# Altium PCB REB215_XPRO_A.PcbDoc (part 1 of 2)
Units mm, origin at the board's own origin, x right, y up, seen from the top; angles counter-clockwise.
Board outline 71.5 x 30 mm, 4 copper layers (Top Layer LF-signals, Mid-1, Mid-2, Bottom Layer LF-signals), stack 0.778 mm thick; 79 components, 55 nets, 329 pads, 316 vias.
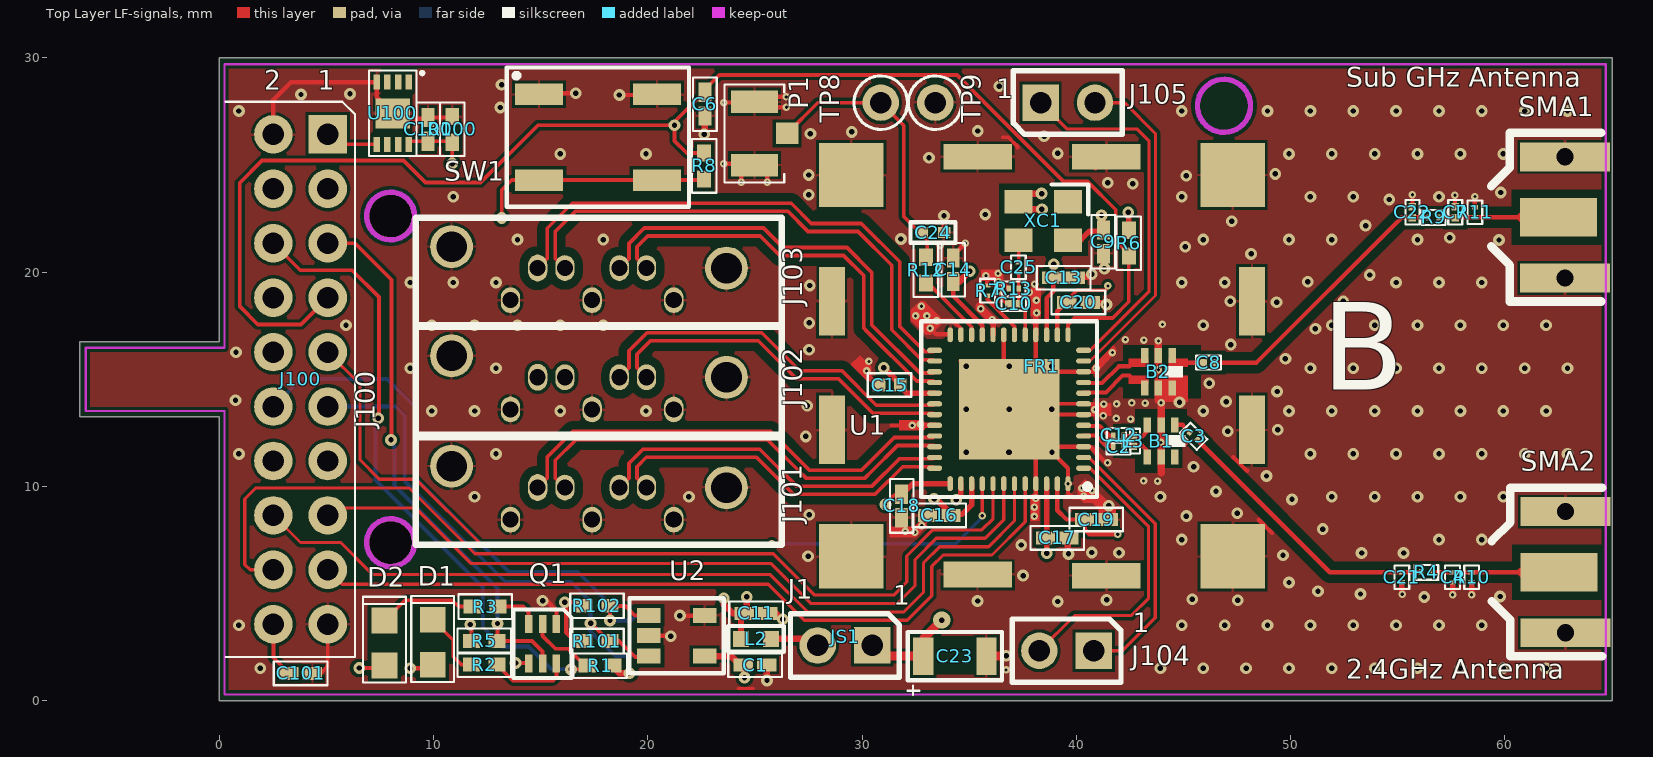
[diagram p0: Top Layer LF-signals view]
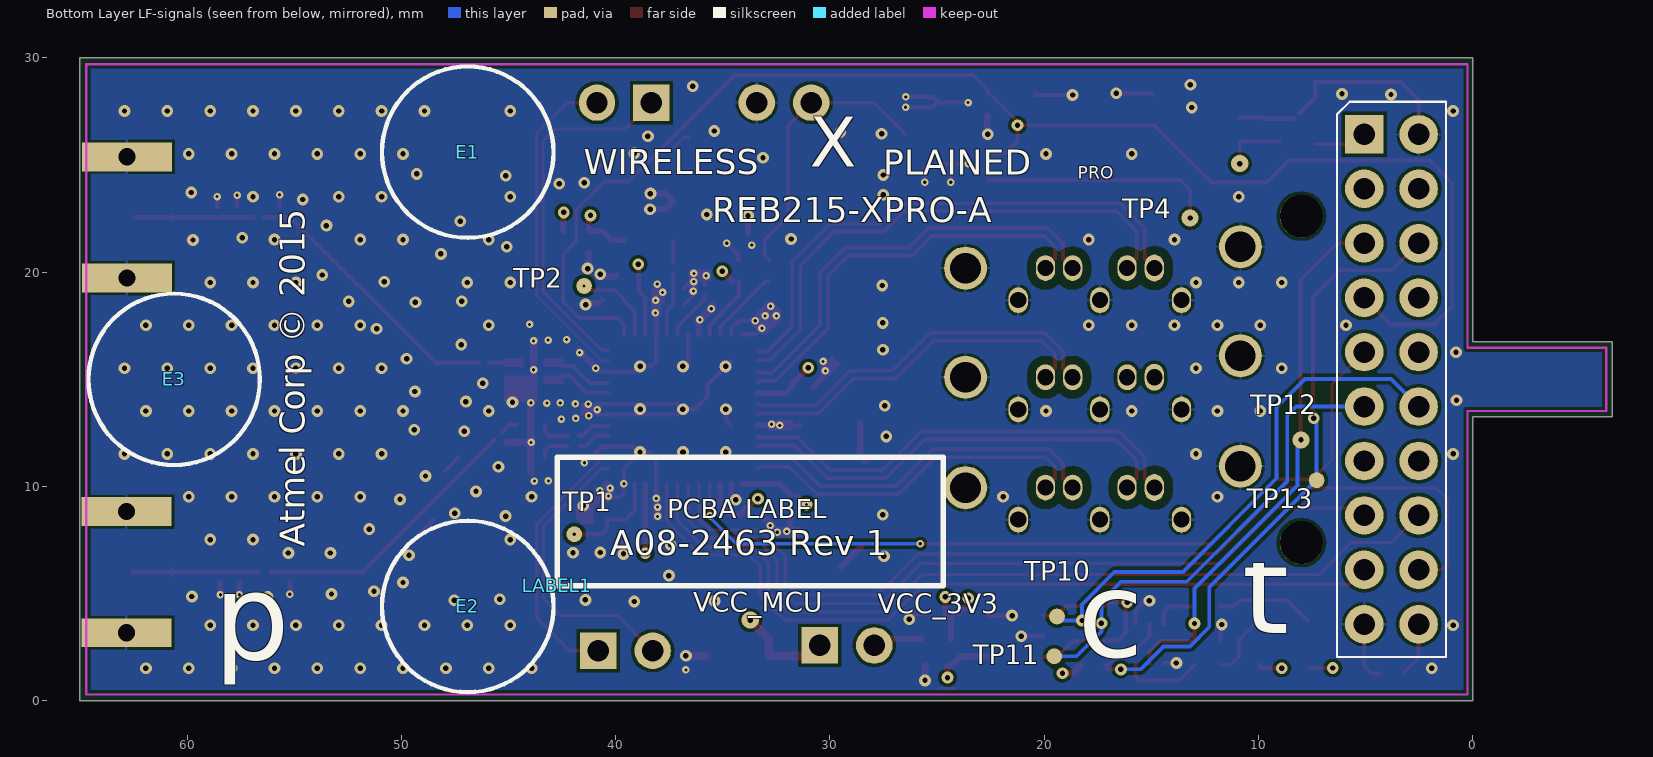
[diagram p1: Bottom Layer LF-signals view, seen from below]
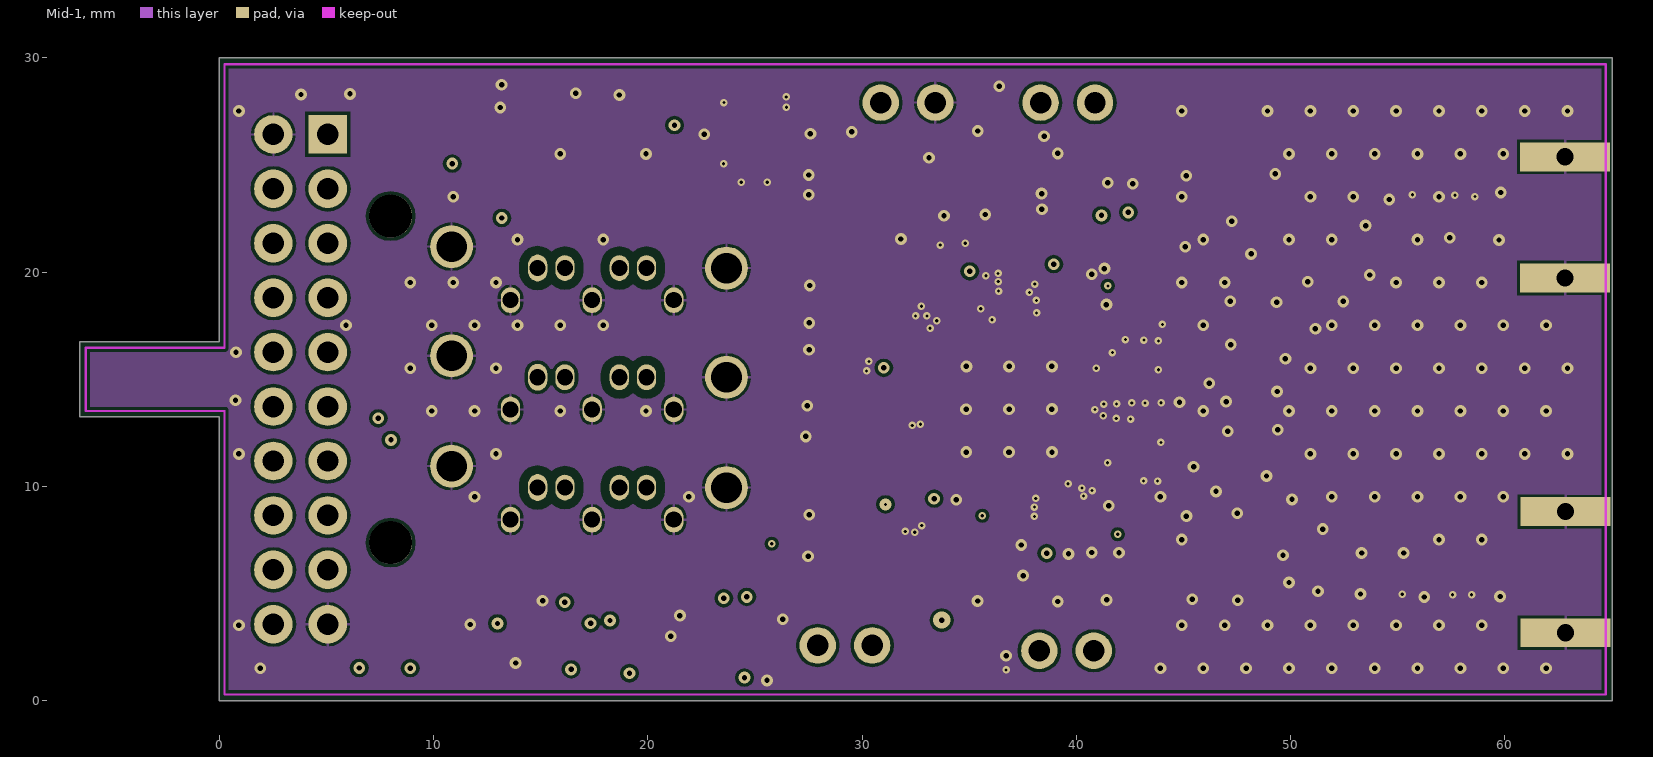
[diagram p2: Mid-1]
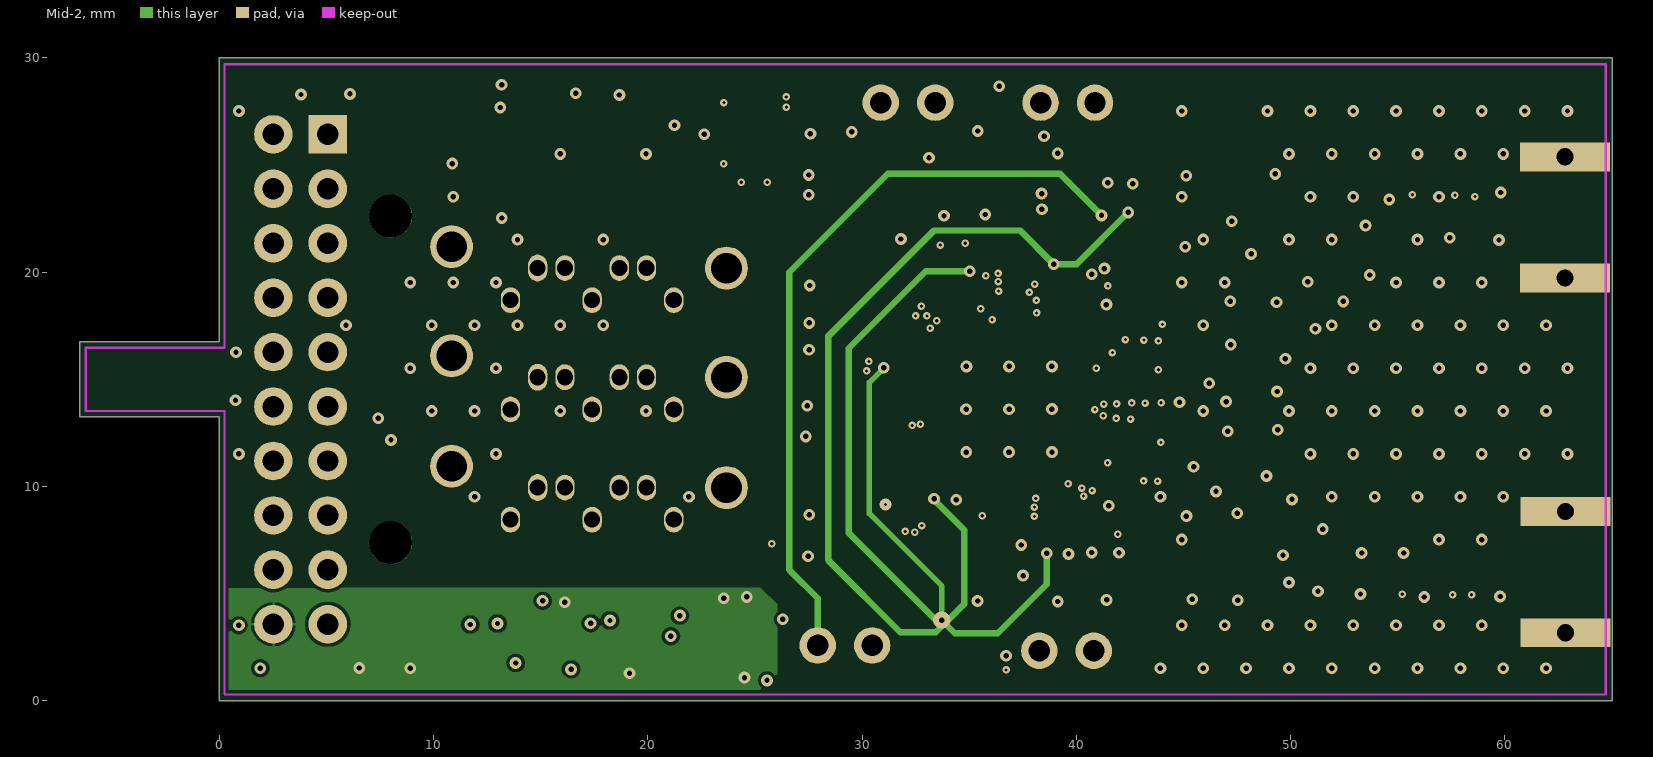
[diagram p3: Mid-2]

## Layer stack, top to bottom
Top Solder: solder mask 0.0102, Solder Resist, Dk 3.5
Top Layer LF-signals: signal copper 0.0356
Dielectric1: core 0.254, FR-4, Dk 4.2
Mid-1: signal copper 0.036
Dielectric2: prepreg 0.127, FR-4, Dk 4.2
Mid-2: signal copper 0.036
Dielectric3: core 0.254, FR-4, Dk 4.2
Bottom Layer LF-signals: signal copper 0.0356
Bottom Solder: solder mask 0.0102, Solder Resist, Dk 3.5

## Board outline
-6.5,13.25 -6.5,16.75 0,16.75 0,30 65,30 65,0 0,0 0,13.25

## Design rules (kind name [scope] priority, off if disabled: settings)
AcuteAngle [All] p1: minimum=5.00000000000000E+0001 checktracksonly=TRUE
AssemblyTestPointUsage [All] p1: allowmultiple=TRUE
AssemblyTestpoint [All] p1: testpointundercomponent=TRUE minsize=0.55 maxsize=10 preferedsize=0.8 minholesize=0 maxholesize=2 preferedholesize=0.25 testpointgrid=0.025 usegrid=FALSE gridtolerance=0 allowsidebottom=TRUE minspacing=1.27 compbodyclearance=0.127
Clearance Clearance_TP [InComponentClass('TP') vs IsRegion] p1 off: gap=0.3
Clearance Clearance_Mid_Layer [OnLayer('Mid-2')] p2 off: gap=0.3
Clearance Clearance_Poly_Impedance [IsRegion vs (InDifferentialPairClass('All Differential Pairs') OR InNet('NetC22_1') OR InNet('NetC7_1') OR InNet('NetC3_2') OR InNet('NetB1_1') OR InNet('NetC4_1')) OR Innet('netRF24_P') OR InNet('NetC8_2') OR InNet('NetC8_1') OR InNet('NetB1_3') OR InNet('NetB1_4')] p3: gap=0.4
Clearance 900Mhz_df [InNet('RF09_P') or InNet('RF09_N') Or InNet('RF24_P') or InNet('RF24_N')] p4: gap=0.16
Clearance Clearance_SPI [InNetClass('SPI') vs InNetClass('SPI')] p5: gap=0.24
Clearance "Stitching GND" [IsStitchingVia and InNet('GND') vs (IsVia and (Not IsStitchingVia)) Or IsPad] p6: gap=0.2
Clearance Clearance_Poly_Impedance_1 [IsRegion vs (InNet('VCC_TARGET') OR InNet('VCC_3V3') OR InNet('NetJ1_1'))] p7 off: gap=0.3
Clearance Clearance_Poly [IsRegion vs (OnLayer('Top Layer LF-signals') OR OnLayer('Bottom Layer LF-signals'))] p8: gap=0.16
Clearance [All] p9: gap=0.15
DiffPairsRouting DiffPairsRouting_900 [InNet('RXD09_N') and Innet('RXD09_P')] p1: maxlimit=0.254 minlimit=0.25 mostfreqgap=0.254 toplayer_maxgap=0.25 toplayer_prefgap=0.25 toplayer_minwidth=0.19 toplayer_maxwidth=0.19 toplayer_prefwidth=0.19 midlayer1_mingap=0.254 midlayer1_minwidth=0.381 midlayer1_maxwidth=0.381 midlayer1_prefwidth=0.381 midlayer2_mingap=0.254 midlayer2_minwidth=0.381 midlayer2_maxwidth=0.381 midlayer2_prefwidth=0.381 bottomlayer_maxgap=0.25 bottomlayer_prefgap=0.25 bottomlayer_minwidth=0.19 bottomlayer_maxwidth=0.19 bottomlayer_prefwidth=0.19 maxuncoupledlength=20
DiffPairsRouting [InNet('RXD24_N') and Innet('RXD24_P')] p2: maxlimit=0.3 minlimit=0.203 mostfreqgap=0.25 toplayer_mingap=0.25 toplayer_maxgap=0.25 toplayer_minwidth=0.195 toplayer_maxwidth=0.195 toplayer_prefwidth=0.195 midlayer1_minwidth=0.381 midlayer1_maxwidth=0.381 midlayer1_prefwidth=0.381 midlayer2_minwidth=0.381 midlayer2_maxwidth=0.381 midlayer2_prefwidth=0.381 bottomlayer_mingap=0.25 bottomlayer_maxgap=0.25 bottomlayer_minwidth=0.195 bottomlayer_maxwidth=0.195 bottomlayer_prefwidth=0.195 maxuncoupledlength=20
FabricationTestPointUsage TestPointUsage [All] p1: valid=0 allowmultiple=TRUE
FabricationTestpoint Testpoint [All] p1: side=2 testpointundercomponent=TRUE minsize=0.55 maxsize=10 preferedsize=0.8 minholesize=0 maxholesize=2 preferedholesize=0.25 testpointgrid=0 allowsidebottom=TRUE usegrid=FALSE gridtolerance=0 minspacing=1.27 compbodyclearance=0.127
HoleSize [All] p1: absolutevalues=TRUE maxlimit=10 minlimit=0.15 maxpercent=80.000 minpercent=20.000
HoleToHoleClearance [All] p1 off: gap=0.3 allowstackedmicrovias=TRUE
MaxMinImpedance "50ohm Impedance" [InNetClass('50ohm Impedance')] p1: minimum=49.00 maximum=51.00
MinimumAnnularRing MinimumAnnularRing_SATA [InComponentClass('Sata')] p1: minimumring=0.04
MinimumAnnularRing [All] p2: minimumring=0.1
MinimumSolderMaskSliver [All] p1: minsoldermaskwidth=0.075
PlaneClearance [All] p1: clearance=0.2
PlaneConnect PlaneConnect_VIA [IsVia] p1: planeconnectstyle=Direct reliefexpansion=0.508 reliefentries=4 reliefconductorwidth=0.254 reliefairgap=0.254
PlaneConnect [All] p2: planeconnectstyle=Relief reliefexpansion=0.508 reliefentries=4 reliefconductorwidth=0.254 reliefairgap=0.254
PolygonConnect PolygonConnect_VIA [IsVia OR HasPad('Free-666')] p1: connectstyle=Direct reliefconductorwidth=0.254 reliefentries=4 polygonreliefangle="90 Angle" airgapwidth=0.254
PolygonConnect [All] p2: connectstyle=Relief reliefconductorwidth=0.125 reliefentries=4 polygonreliefangle="90 Angle" airgapwidth=0.125
RoutingVias [All] p1: holewidth=0.15 width=0.35 viastyle="Through Hole" minholewidth=0.15 minwidth=0.35 maxholewidth=0.5 maxwidth=1
SMDNeckDown [All] p1 off: percent=90.000
SilkToSilkClearance SilkToSilkClearance_Text [IsText vs IsText] p1: silktosilkclearance=0
SilkToSilkClearance [All] p2: silktosilkclearance=0.1
SilkToSolderMaskClearance SilkscreenOverComponentPads [IsPad] p1 off: minsilkscreentomaskgap=0.01 clearancetoexposedcopper=TRUE
SolderMaskExpansion SolderMaskTenting [IsVia AND NOT (IsFabTestpoint OR IsAssyTestpoint)] p1: expansion=-1
SolderMaskExpansion [All] p2: expansion=0.05
ViasUnderSMD [All] p1: allowed=FALSE
Width [All] p1: maxlimit=10 minlimit=0.1 preferedwidth=0.15 toplayer_maxwidth=2 toplayer_prefwidth=0.125 bottomlayer_maxwidth=2 bottomlayer_prefwidth=0.125 minimp=40.000000 maximp=50.000000 favimp=45.000000
17 further rules are at their usual default settings.

## Classes and differential pairs
component class REB215_XPRO_A_TopLevel: E1 E2 E3 LABEL1 PCB1 PCBADOC1 "TEST PROCEDURE" "TEST SW"
component class REB215_XPRO_A: B1 B2 C1 C2 C3 C4 C6 C7 C8 C9 C10 C11 C12 C13 C14 C15 C16 C17 C18 C19 C20 C21 C22 C23 C24 C25 D1 D2 FR1 J1 JS1 L2 L3 P1 Q1 R1 R2 R3 R4 R5 R6 R7 R8 R9 R10 R11 R12 R13 R101 R102 SMA1 SMA2 SW1 TP1 TP2 TP4 TP8 TP9 TP10 TP11 TP12 TP13 U1 U2 XC1
component class Sata: J101 J102 J103 J104 J105
differential pair RXCLK: +RXCLK_P -RXCLK_N
differential pair RXD09: +RXD09_P -RXD09_N
differential pair RXD24: +RXD24_P -RXD24_N
differential pair TXCLK: +TXCLK_P -TXCLK_N
differential pair TXD: +TXD_P -TXD_N
differential pair B1: +B1_P -B1_N

## Components (designator, comment, footprint, x,y, rotation, side; value= is the part's Value field where it differs from the comment)
B1 "Balun_2.4GHz" AP3-00060 44.602,12.869 r270 top
B2 "Balun_2.4GHz" AP3-00060 44.482,16.103 r270 top
C1 "CAP-NONPOL" AP1-00001#1 25.008,1.664 r180 top
C2 "CAP-NONPOL" AP1-00035 41.966,11.854 r0 top
C3 "CAP-NONPOL" AP1-00035 45.476,12.35 r315 top
C4 "This 1.2pF capacitor is used for RF antennae tuning and can not be replaced by alternatives." AP1-00035 57.557,5.765 r270 top
C6 "CAP-NONPOL" AP1-00001#1 22.667,27.84 r270 top
C7 "C0G, NP0" AP1-00032 57.679,22.796 r90 top
C8 "CAP-NONPOL" AP1-00032 46.167,15.777 r0 top
C9 "CAP-NONPOL" AP1-00001#1 41.263,21.414 r270 top
C10 "High Temp version" AP1-00032 37.085,18.528 r180 top
C11 "CAP-NONPOL" AP1-00001#1 25.053,4.079 r180 top
C12 "CAP-NONPOL" AP1-00035 41.967,12.388 r0 top
C13 "CAP-NONPOL" AP1-00001#1 39.403,19.739 r0 top
C14 "CAP-NONPOL" AP1-00001#1 34.252,20.111 r90 top
C15 "CAP-NONPOL" AP1-00001#2 31.282,14.735 r180 top
C16 "CAP-NONPOL" AP1-00001#1 33.604,8.649 r180 top
C17 "CAP-NONPOL" AP1-00001#1 39.107,7.598 r0 top
C18 "CAP-NONPOL" AP1-00001#1 31.846,9.092 r270 top
C19 "CAP-NONPOL" AP1-00001#1 40.934,8.458 r0 top
C20 "CAP-NONPOL" AP1-00001#1 40.096,18.588 r0 top
C21 "This 1.2pF capacitor is used for RF antennae tuning and can not be replaced by alternatives." AP1-00035 55.191,5.766 r270 top
C22 "C0G, NP0" AP1-00032 55.684,22.796 r90 top
C23 "CAP-NONPOL" AP1-00026 34.329,2.088 r0 top
C24 "CAP-NONPOL" AP1-00038 33.312,21.848 r0 top
C25 "Alternate PN GRM033R71C102KA01D  is good, but for Rated Voltage" AP1-00035 37.3,20.225 r270 top
C100 "Recommended by Escatec. No datasheet available yet." AP1-00001#1 9.75,26.665 r90 top
C101 "Recommended by Escatec. No datasheet available yet." AP1-00001#1 3.8,1.275 r0 top
D1 "LED_12" AP4-00013 9.962,2.732 r270 top
D2 "LED_12" AP4-00013 7.72,2.696 r270 top
E1 "RUBBER FEET" AP8-00192 46.9,25.6 r180 bottom locked
E2 "RUBBER FEET" AP8-00192 46.9,4.4 r180 bottom locked
E3 "RUBBER FEET" AP8-00192 60.6,15 r180 bottom locked
FR1 "Shield 20mm x 20mm Frame" AP8-00753 48.093,5.939 r90 top locked
J1 "HEADER 1x2" AP8-00733 29.201,2.582 r180 top
J100 "HEADER-2X10" AP8-00621 3.8,15 r90 top locked
J101 "SATA_7PIN_HEADER" AP8-00746 17.258,9.7 r0 top locked
J102 "SATA_7PIN_HEADER" AP8-00746 17.258,14.846 r0 top locked
J103 "SATA_7PIN_HEADER" AP8-00746 17.258,19.942 r0 top locked
J104 "HEADER 1x2" AP8-00733 39.542,2.335 r180 top locked
J105 "HEADER 1x2" AP8-00733 39.599,27.91 r0 top locked
JS1 "To be used by request from ESCATEC" AP8-00525 29.214,2.996 r0 top
L2 "Inductor_Iron" AP3-00049 25.749,2.885 r180 top
L3 "ceramic chip inductor, 5.6nH, 0201" AP3-00041 42.649,12.121 r270 top
LABEL1 "Comment" AP8-00317 42.715,5.365 r180 bottom
P1 "Copy of A08-0629" AP8-00380 24.973,26.473 r90 top
Q1 "Same as 2N7002 but with two MOSFETs in one package" AP5-00001 15.089,2.662 r270 top
R1 "R2" AP2-00000 17.773,1.637 r0 top
R2 "R2" AP2-00000 12.367,1.686 r180 top
R3 "R2" AP2-00000 12.41,4.395 r180 top
R4 "Copy of A02-0534" AP2-00028 56.337,5.999 r0 top
R5 "R2" AP2-00000 12.372,2.793 r180 top
R6 "R2" AP2-00000 42.446,21.353 r90 top
R7 "R2" AP2-00028 35.854,19.139 r90 top
R8 "R2" AP2-00000 22.633,24.956 r90 top
R9 "Copy of A02-0534" AP2-00028 56.669,22.558 r0 top
R10 "Copy of A02-0535" AP2-00028 58.441,5.765 r90 top
R11 "Copy of A02-0535" AP2-00028 58.596,22.795 r270 top
R12 "R2" AP2-00000 32.98,20.097 r270 top
R13 "Copy of A02-0535" AP2-00028 37.077,19.232 r0 top
R100 "R2" AP2-00000 10.875,26.665 r270 top
R101 "R2" AP2-00000 17.63,2.789 r180 top
R102 "R2" AP2-00000 17.63,4.434 r180 top
SMA1 "Board Edge Mounting" AP8-00443 62.502,22.558 r180 top locked
SMA2 "Board Edge Mounting" AP8-00443 62.526,6 r180 top locked
SW1 "same as A08-0091 but less force is needed; Can be ordered in low volumes from Mouser" AP8-00137 17.675,26.297 r0 top
TP1 "TESTPOINT" AP8-00399 41.926,7.77 r180 bottom
TP2 "TESTPOINT" AP8-00399 41.471,19.357 r90 bottom
TP4 "TESTPOINT" AP8-00399 13.19,22.526 r270 bottom locked
TP8 "Mounting hole dia should be 1.6mm. Refer A08-2059" AP8-00710 30.873,27.91 r270 top locked
TP9 "Mounting hole dia should be 1.6mm. Refer A08-2059" AP8-00710 33.413,27.91 r270 top
TP10 "TESTPOINT" AP8-00399 19.404,3.933 r270 bottom locked
TP11 "TESTPOINT" AP8-00399 19.534,2.074 r270 bottom locked
TP12 "TESTPOINT" AP8-00399 8.021,12.172 r270 bottom locked
TP13 "TESTPOINT" AP8-00399 7.29,10.296 r270 bottom locked
U1 "48 lead QFN package" AP6-00345 36.862,13.605 r180 top locked
U2 "AT24MAC602" AP6-00014 21.349,3.035 r0 top
U100 "ATSHA204A-MAHCZ-T" AP6-00409 8.1,27.415 r270 top
XC1 "TXETCCSANF-26.0000" AP7-00060 38.457,22.394 r180 top

## Footprints (in the part's own frame and the unit in brackets; to place one, negate y for a bottom-side part, rotate by r counter-clockwise, add the part's x,y. Pads: shape width x height; smd on the part's side, far side on the other; paste and mask are expansions set on the pad)
AP1-00001#1 [mm] "Standard 0402 SMD capacitor footprint"
  rect 0.9x0.6 smd: 1(-0.55,0) 2(0.55,0)
  silkscreen extent -1.25,-0.55 1.25,0.55, body extent -0.5,-0.3 0.5,0.3, height 0.2
AP1-00001#2 [mm] "Standard 0402 SMD capacitor footprint"
  rect 0.6x0.6 smd: 1(-0.5,0) 2(0.5,0)
  silkscreen extent -1.02,-0.55 1.02,0.55, body extent -0.5,-0.3 0.5,0.3, height 0.2
AP1-00026 [mm]
  rect 0.95x1.75 smd: 1(-1.475,0) 2(1.475,0)
  silkscreen extent -2.2,-1.12 2.2,1.12, body extent -1.6,-0.8 1.6,0.8, height 1
AP1-00032 [mm]
  rect 0.35x0.35 smd paste-25.4 mask-25.4: 1(-0.25,0) 2(0.25,0)
  silkscreen extent -0.58,-0.33 0.58,0.33, body extent -0.31,-0.15 0.29,0.15, height 0.3
AP1-00035 [mm] "0201_SMD"
  rect 0.205x0.282 smd paste+0 mask+0.063: 1(-0.237,0) 2(0.237,0)
  silkscreen extent -0.55,-0.35 0.55,0.34, body extent -0.31,-0.15 0.29,0.15, height 0.3
AP1-00038 [mm] "Generic pad 0402, spacing 0.45mm"
  rect 0.6x0.5 smd: 1(-0.525,0) 2(0.525,0)
  silkscreen extent -1.05,-0.48 1.05,0.47, body extent -0.5,-0.3 0.5,0.3, height 0.2
AP2-00000 [mm] "Standard 0402 SMD resistor footprint"
  rect 0.8x0.65 smd: 1(-0.6,0) 2(0.6,0)
  silkscreen extent -1.25,-0.58 1.25,0.58, body extent -0.5,-0.3 0.5,0.3, height 0.2
AP2-00028 [mm] "0201_SMD"
  rect 0.205x0.282 smd paste+0 mask+0.063: 1(-0.237,0) 2(0.237,0)
  silkscreen extent -0.55,-0.35 0.55,0.34, body extent -0.3,-0.15 0.3,0.15, height 0.12
AP3-00041 [mm]
  rect 0.35x0.35 smd paste-25.4 mask-25.4: 1(-0.25,0) 2(0.25,0)
  silkscreen extent -0.58,-0.33 0.58,0.33, body extent -0.3,-0.13 0.3,0.15, height 0.35
AP3-00049 [mil]
  rect 30x30 smd: 1(0,0) 2(55,0)
  silkscreen extent -24,-24 79,24, body extent 7,-12 46,12, height 20
AP3-00060 [mm] "0805 6pin Balun, narrow variant"
  rect 0.7x0.35 smd: 1(0,0) 2(0,-0.65) 3(0,-1.3) 4(1.5,-1.3) 5(1.5,-0.65) 6(1.5,0)
  silkscreen extent 0.47,-0.37 1.02,0.5, body extent 0.1,-1.6 1.35,0.35, height 0.85
AP4-00013 [mm] "0805 diode footprint"
  rect 1.2x1.2 smd: 1(-1.05,0) 2(1.05,0)
  silkscreen extent -2.16,-1 1.85,1, body extent -1,-0.63 1,0.63, height 1.1
AP5-00001 [mm]
  rect 0.85x0.35 smd: 1(-0.925,0.65) 2(-0.925,0) 3(-0.925,-0.65) 4(0.925,-0.65) 5(0.925,0) 6(0.925,0.65)
  silkscreen extent -1.6,-1.35 1.6,1.35, body extent -1.05,-1 1.05,1, height 0.95
AP6-00014 [mm]
  rect 1.1x0.7 smd mask+0.07: 1(-1.3,0.95) 2(-1.3,0) 3(-1.3,-0.95) 4(1.3,-0.95) 5(1.3,0.95)
  silkscreen extent -2.2,-1.75 2.2,1.75, body extent -1.5,-1.5 1.5,1.5, height 1.3
AP6-00345 [mm] "48 pin QFN, 7x7 mm"
  oval 0.7x0.25 smd: 1(-3.475,2.75) 2(-3.475,2.25) 3(-3.475,1.75) 4(-3.475,1.25) 5(-3.475,0.75) 6(-3.475,0.25) 7(-3.475,-0.25) 8(-3.475,-0.75) 9(-3.475,-1.25) 10(-3.475,-1.75) 11(-3.475,-2.25) 12(-3.475,-2.75) 25(3.475,-2.75) 26(3.475,-2.25) 27(3.475,-1.75) 28(3.475,-1.25) 29(3.475,-0.75) 30(3.475,-0.25) 31(3.475,0.25) 32(3.475,0.75) 33(3.475,1.25) 34(3.475,1.75) 35(3.475,2.25) 36(3.475,2.75)
  rect 4.7x1.4 on Top Solder: 4.8(0,-1) 14(0,1)
  rrect50% 1.65x1.65 on Top Paste: 10(-1,1) 11(-1,-1) 12(1.025,-0.975) 13(1,1)
  oval 0.25x0.7 smd: 13(-2.75,-3.475) 14(-2.25,-3.475) 15(-1.75,-3.475) 16(-1.25,-3.475) 17(-0.75,-3.475) 18(-0.25,-3.475) 19(0.25,-3.475) 20(0.75,-3.475) 21(1.25,-3.475) 22(1.75,-3.475) 23(2.25,-3.475) 24(2.75,-3.475) 37(2.75,3.475) 38(2.25,3.475) 39(1.75,3.475) 40(1.25,3.475) 41(0.75,3.475) 42(0.25,3.475) 43(-0.25,3.475) 44(-0.75,3.475) 45(-1.25,3.475) 46(-1.75,3.475) 47(-2.25,3.475) 48(-2.75,3.475)
  rect 1.4x4.7 on Top Solder: 16(-1,0) 17(1,0)
  rect 4.7x4.7 smd paste-5.2 mask-5.2: 49(0,0)
  silkscreen extent -4.1,-4.1 4.1,4.1, body extent -3.5,-3.5 3.5,3.5, height 0.91
AP6-00409 [mm]
  rect 0.7x0.3 smd mask+0.075: 1(-1.45,0.75) 2(-1.45,0.25) 3(-1.45,-0.25) 4(-1.45,-0.75) 5(1.45,-0.75) 6(1.45,-0.25) 7(1.45,0.25) 8(1.45,0.75)
  rect 1.4x1.6 smd paste-0.025 mask+0.075: 9(0,0)
  silkscreen extent -2,-1.1 2,1.45, body extent -1.55,-1.05 1.55,1.05, height 0.6
AP7-00060 [mm] "Geyer KX-7 Crystal 3.2X2"
  rect 1.3x1.1 smd: 1(-1.15,-0.9) 2(1.15,-0.9) 3(1.15,0.9) 4(-1.15,0.9)
  silkscreen extent -2.1,-1.7 -0.4,-0.3, body extent -1.61,-1.25 1.61,1.25, height 0.82
AP8-00137 [mm]
  rect 2.25x1 smd: 1(-2.75,2) 2(2.75,2) 3(-2.75,-2) 4(2.75,-2)
  silkscreen extent -4.25,-3.25 4.25,3.25, body extent -3.4,-3.21 3.4,3.22, height 3.47
AP8-00192 [mm]
  silkscreen extent -4,-4 4,4, body extent -3.97,-3.99 4,3.99, height 2.79
AP8-00317 [mm] "Placement area for 18x6mm sticker"
  silkscreen extent 0,0 18,6
AP8-00380 [mm]
  rect 1x1.05 smd: 1(0,-1.525)
  rect 1.05x2.2 smd: 2(-1.475,0) 3(1.475,0)
  silkscreen extent -2.29,-1.4 2.29,1.4, body extent -1.48,-1.55 1.52,1.55, height 1.23
AP8-00399 [mil] "Testpad 29 mil"
  round 29 smd paste-25: 1(0,0)
AP8-00443 [mm] "SMA card edge mount 1.6mm substrate"
  rect 3.6x1.8 smd paste-0.9 mask+0: 1(0,0)
  rect 4.2x1.35 hole 0.8 paste-0.3 mask+0: 2(-0.3,-2.825) 2.1(-0.3,2.825)
  silkscreen extent -2,-3.95 3.15,3.92, body extent -12.17,-3.18 1.16,3.18, height 3.71
AP8-00525 [mm] "Jumper 2.54mm, 3D"
  body extent -2.49,-1.22 2.49,1.22, height 5.97
AP8-00621 [mm] "2x5 Receptacle THM, Right Angle. No Guide. 2.54mm pitch. Length 13.2mm, width 5.0mm, height 5mm"
  rect 1.8x1.8 hole 1: 1(11.43,-1.27)
  rect 2.1x2.1 on Top Paste: 1(11.43,-1.27) 2(11.43,1.27) 3(8.89,-1.27) 4(8.89,1.27) 5(6.35,-1.27) 6(6.35,1.27) 7(3.81,-1.27) 8(3.81,1.27) 9(1.27,-1.27) 10(1.27,1.27) 11(-1.27,-1.27) 12(-1.27,1.27) 13(-3.81,-1.27) 14(-3.81,1.27) 15(-6.35,-1.27) 16(-6.35,1.27) 17(-8.89,-1.27) 18(-8.89,1.27) 19(-11.43,-1.27) 20(-11.43,1.27)
  round 1.8 hole 1: 2(11.43,1.27) 3(8.89,-1.27) 4(8.89,1.27) 5(6.35,-1.27) 6(6.35,1.27) 7(3.81,-1.27) 8(3.81,1.27) 9(1.27,-1.27) 10(1.27,1.27) 11(-1.27,-1.27) 12(-1.27,1.27) 13(-3.81,-1.27) 14(-3.81,1.27) 15(-6.35,-1.27) 16(-6.35,1.27) 17(-8.89,-1.27) 18(-8.89,1.27) 19(-11.43,-1.27) 20(-11.43,1.27)
  body extent -12.95,-1.47 12.95,11.3, height 4.98
AP8-00710 [mm] "THM Test Point, 1.0mm Dia. Mounting Hole"
  round 1.7 hole 1: 1(0,0)
  rect 1.75x1.75 on Top Paste: 3(0,0)
  silkscreen extent -1.25,-1.25 1.25,1.25, body extent -1.25,-1.25 1.25,1.25, height 2.5
AP8-00733 [mm] "Pin header 1x2 Pin in Paste"
  rect 1.7x1.7 / inner round 1.7 / far side rect 1.7x1.7 hole 1: 1(-1.27,0)
  rect 2.1x2.1 on Top Paste: 1(-1.27,0) 2(1.27,0)
  round 1.7 hole 1: 2(1.27,0)
  silkscreen extent -2.54,-1.48 2.54,1.48, body extent -2.54,-1.27 2.54,1.27, height 8.38
AP8-00746 [mm]
  oval 0.9x1.2 hole 0.75: 1(3.955,-1.25) 2(2.685,0.25) 3(1.415,0.25) 4(0.145,-1.25) 5(-1.125,0.25) 7(-3.665,-1.25)
  oval 0.9x1.2 on Top Paste: 1(3.955,-1.25) 2(2.685,0.25) 3(1.415,0.25) 4(0.145,-1.25) 5(-1.125,0.25) 6(-2.395,0.25) 7(-3.665,-1.25)
  oval 0.9x1.25 hole 0.75: 6(-2.395,0.25)
  round 2 hole 1.425: 8(-6.415,1.25) 9(6.415,0.25)
  round 2 on Top Paste: 8(6.415,0.25) 9(-6.415,1.25)
  silkscreen extent -8.08,-2.42 9,2.6, body extent -7.58,-1.75 8.42,2.25, height 8.2
AP8-00753 [mm] "SMT Metal Shield Frame"
  rect 1.2x3.2 smd paste-3.2: 1(-0.1,6.7) 1(-0.05,12.7) 1(19.45,6.7) 1(19.45,12.7)
  rect 3x3 smd paste-3: 1(0.8,18.6) 1(0.8,0.8) 1(18.6,18.6) 1(18.6,0.8)
  rect 3.2x1.2 smd paste-3.2: 1(6.7,19.5) 1(6.7,-0.1) 1(12.7,19.5) 1(12.7,-0.1)
  body extent -0.3,-0.3 19.7,19.7, height 3.2

## Part data
B1: library part A03-0130, "2.45 GHz Balun / Filter Combination"
B2: library part A03-0235, "863/915 MHz ISM band Balun+LPF for AT86RF215"
C1 C9 C11 C13 C14 C15 C16 C17: library part A01-0246, "Ceramic capacitor, SMD 0402, X7R, 16V, +/-10%"
C2 C12: library part A01-0682, "CAP CER 1.8PF 25V NP0 0201"
C3: library part A01-0683, "CAP CER 0.8PF 25V NP0 0201"
C4 C21: library part A01-0612, "Ceramic Capacitor, SMD 0201, 25V, NP0, 1.2pF"
C6: library part A01-0046, "Ceramic capacitor, SMD 0402, X7R, 25V, +/-10% (de35287)"
C7 C22: library part A01-0472, "CAP CER 2.2PF 6.3V NP0 0201"
C8: library part A01-0611, "CAP CER 15PF 25V NP0 0201"
C10: library part A01-0581, "CAP CER 10PF 25V ±.25pf ( and ±.30ppm/ degree C of temp variation) NP0 0201"
C18 C19 C20: library part A01-0286, "Ceramic capacitor, SMD 0402, X5R, 6.3V, +/-10% (de26942)"
C23: library part A01-0276, "Ceramic capacitor, SMD 1206, X5R, 6.3V, ±10%"
C24: library part A01-0351, "Ceramic capacitor, SMD 0402, NP0, 50V, +/-0.25pF (de23847)"
C25: library part A01-0577, "Ceramic capacitor, SMD 0201, X7R, 10V, +/-10%"
C100 C101: library part A01-0347, "Ceramic capacitor, SMD 0402, X5R, 6.3V, +/-20% (de33687)"
D1: library part A10-0018, "LED, Green, Wave length=575nm, SMD 0805, ±70°"
D2: library part A10-0019, "LED, Yellow, Wave length=591nm, SMD 0805, ±70°"
E1 E2 E3: library part A08-0053, "2.8mm adhesive feet,diam 8.0mm"
FR1: library part A08-1821, "SMD frame for metal shield 20mm x 20mm (de34031)"
J1 J104 J105: library part A08-1754, "1x2 pin header, 2.54mm pitch, Pin-in-Paste THM"
J100: library part A08-1512, "2x10, female pin header receptable, right-angled, 2.54mm pitch, THM, Pin In Paste"
J101 J102 J103: library part A08-1789, "1.27mm Pitch Serial ATA High Speed Header, Through Hole, Vertical, 7 Circuits"
JS1: library part A08-0543, "Jumper cap for 2.54mm pinheader"
L2: library part A03-0072, "SMD-Ferrite 220Ohm, 100MHz 0603 size, (de14411)"
L3: library part A03-0150
LABEL1: library part A09-0847
P1: library part A08-0838, "UFL (Small Coax Connector)"
Q1: library part A05-0051, "Dual N-Channel MOSFET, 60V, 115mA cont,RDS(ON) < 7.5 Ohm @50mA@5V, SOT-363"
R1 R5: library part A02-0284, "Thick film resistor, SMD 0402, 1/16W, 1%"
R2 R3: library part A02-0200, "Thick film resistor, SMD 0402, 1/16W, 1%"
R4 R9: library part A02-0553, "Thick film resistor, SMD 0201, 1/20W, 5%"
R6 R100: library part A02-0260, "Thick film resistor, SMD 0402, 1/16W, 1%"
R7: library part A02-0677, "RES 100K OHM 1/20W 5% 0201 SMD"
R8: library part A02-0178, "Thick film resistor, SMD 0402, 1/16W, 1%"
R10 R11 R13: library part A02-0541, "Thick film resistor, SMD 0201, 1/20W, 5%"
R12: library part A02-0196, "Thick film resistor, SMD 0402, 1/16W, 1%"
R101 R102: library part A02-0236, "Thick film resistor, SMD 0402, 1/16W, 1%"
SMA1 SMA2: library part A08-1047, "End Launch Jack Receptacle, Round Contact (de21535)"
SW1: library part A08-0790, "SWITCH, SMD, 2.45N, 6.2mm X 6.2mm"
TP1 TP2 TP4 TP10 TP11 TP12 TP13: library part A08-0892, "Single SMD testpad"
TP8 TP9: library part A08-1716, "THM Test Point, Without Base, 1.0mm Dia. Mounting"
U1: library part A06-0976, "Sub-1GHz/2.4GHz Transceiver"
U2: library part A06-0871, "IC EEPROM 2KBIT 1MHz, 1.7V to 5.5V, SOT23-5"
U100: library part A06-1276, "ATSHA204A with 1-wire interface and UDFN8 package"
XC1: library part A07-0087, "26MHz TCXO, 2.8 ~ 3.3V, Clipped sine wave 10KOhm/10pF, 3.2 x 2.5 mm SMD"

## Free pads (board coordinates)
  round 2 hole 2 unplated: 2(8,22.62) 3(8,7.38)

## Via types
v1: diameter 0.55, hole 0.25, Top Layer LF-signals to Bottom Layer LF-signals, 165 vias
v2: diameter 0.35, hole 0.15, Top Layer LF-signals to Bottom Layer LF-signals, 66 vias
v3: diameter 0.55, hole 0.25, Top Layer LF-signals to Bottom Layer LF-signals, tented both sides, 59 vias
v4: diameter 0.55, hole 0.25, Top Layer LF-signals to Bottom Layer LF-signals, tented top, 19 vias
v5: diameter 0.55/0.55/0.55/0.8 (per signal layer), hole 0.25, Top Layer LF-signals to Bottom Layer LF-signals, tented top, 3 vias
v6: diameter 0.35/0.35/0.35/0.55 (per signal layer), hole 0.15, Top Layer LF-signals to Bottom Layer LF-signals, tented top, 2 vias
v7: diameter 0.8, hole 0.25, Top Layer LF-signals to Bottom Layer LF-signals, 1 vias
v8: diameter 0.55/0.55/0.55/0.55 (per signal layer), hole 0.15, Top Layer LF-signals to Bottom Layer LF-signals, tented top, 1 vias

## Nets (pads, with @x,y where several pads share a name; then routed paths per layer and width w, separated by ;. In a path a pad name is that pad's centre, name@x,y a point inside that pad or via, vN(x,y) a via of type N, cw(c..) or ccw(c..) an arc to the next point about the centre after c; other vN are vias at no path point)
AVDD0: C20.1 TP2.1 U1.14@39.112,17.08 | length 4.1
  Top Layer LF-signals w0.17: C20.1@39.653,18.716 39.653,18.779 40.03,19.156 41.343,19.156 v6@41.558,19.371
  Top Layer LF-signals w0.203: U1.14@39.112,17.08 39.112,18.175 C20.1@39.653,18.716
  other v6: 41.471,19.357
AVDD1: C19.1 TP1.1 U1.47 | length 4.8
  Top Layer LF-signals w0.203: U1.47@39.112,10.13 39.112,8.89 39.544,8.458 40.402,8.458 40.402,7.981 40.613,7.77 v6(41.926,7.77)
B1_N: B1.3 C12.2 L3.1 | length 1.5
  Top Layer LF-signals w0.195: C12.2@42.235,12.392 42.283,12.344 43.088,12.344 43.303,12.559 B1.3@43.303,12.871
B1_P: B1.4 C2.2 L3.2 | length 1.5
  Top Layer LF-signals w0.195: C2.2@42.253,11.854 42.297,11.898 43.088,11.898 43.303,11.683 B1.4@43.303,11.371
DVDD: C18.1 U1.37 | length 3.4
  Top Layer LF-signals w0.175: v8(31.094,9.163) 31.094,9.197 31.489,9.592 C18.1@31.846,9.592
  Top Layer LF-signals w0.254: C18.1@31.846,9.592 32.384,10.13 U1.37@34.112,10.13